# Altium PCB STM32F103ZET6.PCBDOC (part 2 of 5)
Units mil, origin at the board's own origin, x right, y up, seen from the top; angles counter-clockwise.
Board outline 7118.03 x 3660.03 mil, 2 copper layers (Top Layer, Bottom Layer); 158 components, 198 nets, 727 pads, 128 vias.
Unrouted connection lines stored in the file: 5.
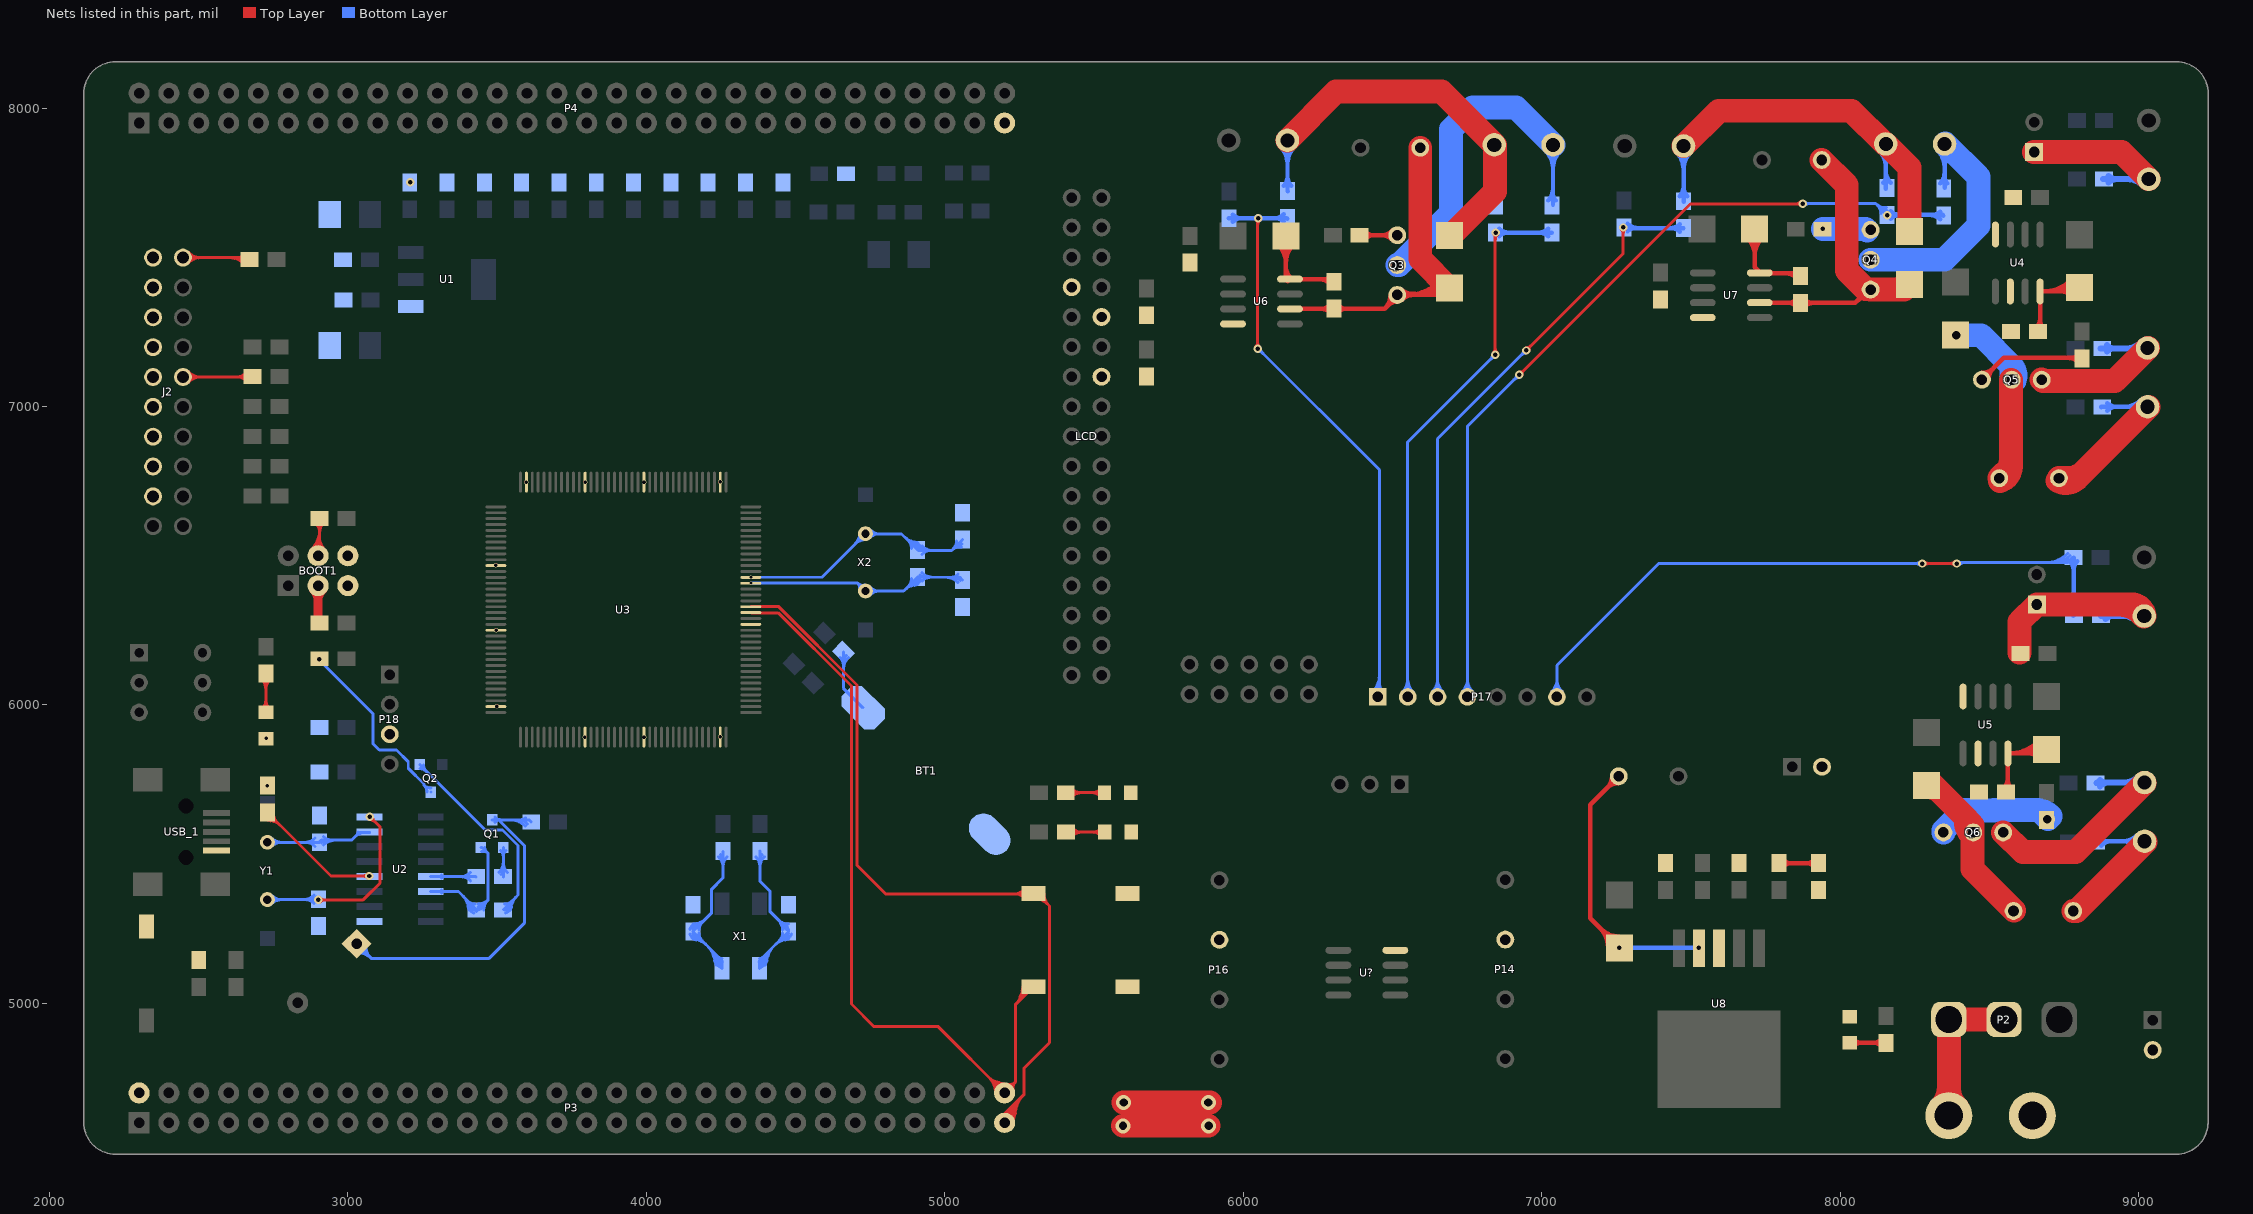
[diagram p2: the nets of this part, all layers, seen from the top]

## Via types
v1: diameter 15, hole 12, Top Layer to Bottom Layer, 57 vias
v2: diameter 28, hole 15, Top Layer to Bottom Layer, 53 vias
v3: diameter 50, hole 28, Top Layer to Bottom Layer, 10 vias
v4: diameter 12, hole 10, Top Layer to Bottom Layer, 4 vias
v5: diameter 20, hole 15, Top Layer to Bottom Layer, 2 vias
v6: diameter 48, hole 28, Top Layer to Bottom Layer, 1 vias
v7: diameter 40, hole 28, Top Layer to Bottom Layer, 1 vias

## Nets (pads, with @x,y where several pads share a name; then routed paths per layer and width w, separated by ;. In a path a pad name is that pad's centre, name@x,y a point inside that pad or via, vN(x,y) a via of type N, cw(c..) or ccw(c..) an arc to the next point about the centre after c; other vN are vias at no path point) (continued)
CY4: P17.7 R35.1 R43.2 | length 2788.9
  Top Layer w10: v2(8275,6474) v2(8390,6474) ; v2@8281.36,6467.64 cw(c8296.73,6452.27) 8296.73,6474 cw(c8296.73,6495.73) v2@8281.36,6480.36 ; v2@8383.64,6467.64 ccw(c8368.27,6452.27) 8368.27,6474 ccw(c8368.27,6495.73) v2@8383.64,6480.36
  Bottom Layer w10: P17.7@7033.66,6044.34 ccw(c6991.79,6086.21) 7051,6086.21 ccw(c7110.21,6086.21) P17.7@7068.34,6044.34 ; P17.7@7040.73,6037.27 ccw(c7015.93,6062.07) 7051,6062.07 ccw(c7086.07,6062.07) P17.7@7061.27,6037.27 ; P17.7@7051,6027 7051,6133 7392,6474 v2@8274,6474 ; v2@8268.64,6467.64 ccw(c8253.27,6452.27) 8253.27,6474 ccw(c8253.27,6495.73) v2@8268.64,6480.36 ; v2(8390,6474) 8393,6477 8762,6477 R35.1@8779,6494 ; v2@8396.36,6467.64 cw(c8418.97,6445.03) 8418.97,6477 ; v2@8396.36,6480.36 ccw(c8404.49,6488.49) 8404.49,6477 ; 8687.67,6477 ccw(c8687.67,6583.33) R35.1@8762.86,6508.14 ; 8711.82,6477 ccw(c8711.82,6559.18) R35.1@8769.93,6501.07 ; 8735.96,6477 ccw(c8735.96,6535.04) R35.1@8777,6494
  Bottom Layer w15: R35.1@8769.63,6481.63 cw(c8739.75,6451.75) 8782,6451.75 cw(c8824.25,6451.75) R35.1@8794.37,6481.63 ; R43.2@8771.63,6311.37 ccw(c8746.58,6336.42) 8782,6336.42 ; R43.2@8781,6299 8782,6300 R35.1@8782,6494 ; 8782,6346.08 ccw(c8831.08,6346.08) R43.2@8796.37,6311.37
CY5: P17.2 R36.1 R44.2 | length 2274.1
  Top Layer w10: v2@6837.64,7180.36 ccw(c6822.27,7195.73) 6844,7195.73 ccw(c6865.73,7195.73) v2@6850.36,7180.36 ; v2@6839.64,7576.64 cw(c6829.1,7566.1) 6844,7566.1 ; v2(6844,7174) 6844,7581 v2(6846,7583) ; 6844,7556.44 cw(c6872.56,7556.44) v2@6852.36,7576.64
  Bottom Layer w10: P17.2@6533.66,6044.34 ccw(c6491.79,6086.21) 6551,6086.21 ccw(c6610.21,6086.21) P17.2@6568.34,6044.34 ; P17.2@6540.73,6037.27 ccw(c6515.93,6062.07) 6551,6062.07 ccw(c6586.07,6062.07) P17.2@6561.27,6037.27 ; P17.2@6551,6027 6551,6881 v2(6844,7174) ; v2@6835,7174 cw(c6813.27,7174) 6828.64,7158.64 cw(c6844,7143.27) v2@6844,7165
  Bottom Layer w15: v2(6846,7583) R36.1@7034,7583 ; R44.2@6850.6,7578.4 cw(c6861.69,7567.31) 6861.69,7583 cw(c6861.69,7598.69) R44.2@6850.6,7587.6 ; R44.2@6857.37,7570.63 cw(c6887.25,7540.75) 6887.25,7583 cw(c6887.25,7625.25) R44.2@6857.37,7595.37 ; R36.1@7021.63,7570.63 ccw(c6991.75,7540.75) 6991.75,7583 ccw(c6991.75,7625.25) R36.1@7021.63,7595.37
CY6: P17.1 R37.1 R45.2 | length 2394.5
  Top Layer w10: v2@6041.64,7200.36 ccw(c6026.27,7215.73) 6048,7215.73 ccw(c6069.73,7215.73) v2@6054.36,7200.36 ; v2@6043.64,7624.64 cw(c6033.1,7614.1) 6048,7614.1 ; v2(6048,7194) 6048,7630 v2@6049,7631 ; 6048,7604.44 cw(c6076.56,7604.44) v2@6056.36,7624.64
  Bottom Layer w10: v2@6046,7198 6456,6788 6456,6032 P17.1@6451,6027 ; v2@6048,7185 cw(c6048,7158.44) 6066.78,7177.22 ; v2@6057,7194 ccw(c6073.9,7194) 6061.95,7182.05 ; P17.1@6433.66,6044.34 ccw(c6379.71,6098.29) 6456,6098.29 ; P17.1@6440.73,6037.27 ccw(c6403.86,6074.14) 6456,6074.14 ccw(c6498.14,6074.14) P17.1@6468.34,6044.34
  Bottom Layer w15: R37.1@5952,7631 v2(6050,7631) 6145,7631 R45.2@6147,7629 ; R37.1@5964.37,7618.63 cw(c5994.25,7588.75) 5994.25,7631 cw(c5994.25,7673.25) R37.1@5964.37,7643.37 ; v2@6045.4,7626.4 ccw(c6034.31,7615.31) 6034.31,7631 ccw(c6034.31,7646.69) v2@6045.4,7635.6 ; v2@6054.6,7626.4 cw(c6065.69,7615.31) 6065.69,7631 cw(c6065.69,7646.69) v2@6054.6,7635.6 ; 6103.34,7631 ccw(c6103.34,7676.66) R45.2@6135.63,7644.37 ; 6108.17,7631 cw(c6108.17,7592.17) R45.2@6135.63,7619.63
CY7: P17.4 R38.1 R46.2 | length 3390.6
  Top Layer w10: v2(6925,7106) 7498,7679 7875,7679 v2@7877,7681 ; v2@6925,7115 ccw(c6925,7136.73) 6940.36,7121.36 ccw(c6955.73,7106) v2@6934,7106 ; 7849.86,7679 ccw(c7849.86,7704.14) v2@7867.64,7686.36 ; 7854.69,7679 cw(c7854.69,7660.69) v2@7867.64,7673.64
  Bottom Layer w10: P17.4@6733.66,6044.34 ccw(c6691.79,6086.21) 6751,6086.21 ccw(c6810.21,6086.21) P17.4@6768.34,6044.34 ; P17.4@6740.73,6037.27 ccw(c6715.93,6062.07) 6751,6062.07 ccw(c6786.07,6062.07) P17.4@6761.27,6037.27 ; P17.4@6751,6027 6751,6934 v2@6923,7106 ; 6906.22,7089.22 cw(c6925,7070.44) v2@6925,7097 ; 6911.05,7094.05 ccw(c6899.1,7106) v2@6916,7106 ; v2(7874,7680) 8119,7680 ; v2@7880.36,7673.64 cw(c7895.73,7658.27) 7895.73,7680 cw(c7895.73,7701.73) v2@7880.36,7686.36 ; 8126.39,7672.61 cw(c8100.79,7647) R46.2@8137,7647 ; R46.2@8134.08,7664.92 ccw(c8153.57,7684.4) R46.2@8156.09,7656.96 ; R46.2@8149,7641 ccw(c8127.27,7641) 8142.64,7656.36 ccw(c8158,7671.73) R46.2@8158,7650 ; R46.2@8155.17,7666.92 cw(c8151.04,7712.04) 8119,7680 ; R46.2@8159,7640 v2(8158,7641) R46.2@8157,7642 8119,7680
  Bottom Layer w15: R46.2@8157,7642 8344,7642 R38.1@8346,7640 ; R46.2@8162.6,7636.4 cw(c8176.11,7622.89) R46.2@8176.11,7642 ; R46.2@8169.37,7629.63 cw(c8199.25,7599.75) 8199.25,7642 cw(c8199.25,7684.25) R46.2@8169.37,7654.37 ; 8299.92,7642 cw(c8299.92,7592.92) R38.1@8334.63,7627.63 ; 8309.58,7642 ccw(c8309.58,7677.42) R38.1@8334.63,7652.37
CY8: P17.3 R39.1 R47.2 | length 2429.1
  Top Layer w10: v2(6948,7188) 7273,7513 v2(7273,7600) ; v2@6948,7197 ccw(c6948,7218.73) 6963.36,7203.36 ccw(c6978.73,7188) v2@6957,7188 ; v2@7266.64,7593.64 cw(c7251.27,7578.27) 7273,7578.27 cw(c7294.73,7578.27) v2@7279.36,7593.64
  Bottom Layer w10: P17.3@6633.66,6044.34 ccw(c6591.79,6086.21) 6651,6086.21 ccw(c6710.21,6086.21) P17.3@6668.34,6044.34 ; P17.3@6640.73,6037.27 ccw(c6615.93,6062.07) 6651,6062.07 ccw(c6686.07,6062.07) P17.3@6661.27,6037.27 ; P17.3@6651,6027 6651,6892 6945,7186 v2@6947,7186 ; 6930.93,7171.93 cw(c6948,7154.86) v2@6948,7179 ; 6933.34,7174.34 ccw(c6919.69,7188) v2@6939,7188
  Bottom Layer w15: R39.1@7277,7600 7279,7598 R47.2@7475,7598 ; R39.1@7277.6,7604.6 ccw(c7293.52,7620.52) R39.1@7293.52,7598 ; R39.1@7287.37,7587.63 cw(c7312.42,7562.58) 7312.42,7598 ; R39.1@7287.37,7612.37 ccw(c7322.08,7647.08) 7322.08,7598 ; R47.2@7462.63,7585.63 ccw(c7432.75,7555.75) 7432.75,7598 ccw(c7432.75,7640.25) R47.2@7462.63,7610.37
GND: BOOT1.5 BOOT1.6 BT1.2 C1.2 C2.2 C3.2 C4.2 C8.2 C9.2 C10.2 C11.2 C12.2 C13.2 C14.2 C15.2 C16.2 C17.2 C18.2 C19.1 C20.1 C21.1 C22.1 C23.1 C24.2 C25.1 C26.2 C27.2 C28.1 C29.2 C30.2 C31.2 C32.1 C33.1 C34.2 C35.2 C36.2 C37.1 C38.2 C39.2 C40.1 C42.2 C44.2 D15.2 J2.4 J2.6 J2.8 J2.10 J2.12 J2.14 J2.16 J2.18 J2.20 key1.1 key2.1 L3.2 LCD.22 LCD.26 LCD.27 LD1.2 LD2.2 LD3.2 P1.1 P3.2 P4.59 P5.2 P6.2 P11.2 P12.2 P14.3 P16.3 P18.3 Q5.3 Q6.3 R28.2 R40.1 R41.1 R42.1 R43.1 RESET.2 U1.1 U2.1 U3.16 U3.38 U3.51 U3.61 U3.71 U3.83 U3.94 U3.107 U3.120 U3.130 U3.143 U4.4 U4.6 U5.4 U5.6 U6.4 U7.4 U8.3 U?.4 USB_1.5 | length 4030.9
  Top Layer w15: C36.2@8570,7255 C36.2@8578,7247
  Top Layer w80: v3(5597,4590) v3@5883,4590 ; v3(5599,4668) v3(5883,4668) 5888,4668 v3@5889,4667 ; Q6.3@8546,5573 8612,5507 8789,5507 P6.2@9020,5738 ; C38.2@8601,6175 8601,6279 C40.1@8659,6337 8976,6337 ; C37.1@8650,7853 8942,7853 P12.2@9033,7762 ; Q5.3@8675,7090 8679,7086 8920,7086 P11.2@9031,7197 ; 8926.1,6337 cw(c8926.1,6204.99) P5.2@9019.45,6298.34 ; P5.2@9017,6296 8976,6337 ; P5.2@9019.63,6297.96 ccw(c8976,6293.11) 8976,6337
  Bottom Layer w20: R42.1@8858,5738 8860.11,5740.11 P6.2@9020,5740.11 ; R42.1@8870.61,5727.39 cw(c8901.31,5696.69) 8901.31,5740.11 ; R42.1@8870.61,5748.61 ccw(c8891.12,5769.12) 8891.12,5740.11 ; R40.1@8873,7194 9027.89,7194 P11.2@9030,7196.11 ; R43.1@8873.5,6298.5 8874.11,6297.89 P5.2@9019,6297.89 ; R41.1@8881,7763 8882.11,7761.89 P12.2@9034,7761.89 ; R43.1@8889.61,6288.39 cw(c8912.53,6265.47) 8912.53,6297.89 ; R43.1@8889.61,6309.61 ccw(c8917.89,6337.89) 8917.89,6297.89 ; R40.1@8893.61,7184.39 cw(c8916.8,7161.2) 8916.8,7194 ; R40.1@8893.61,7205.61 ccw(c8921.63,7233.63) 8921.63,7194 ; R41.1@8899.61,7751.39 cw(c8924.95,7726.05) 8924.95,7761.89 ; R41.1@8899.61,7772.61 ccw(c8925.48,7798.48) 8925.48,7761.89 ; 8954,7194 ccw(c8954,7272.11) P11.2@9009.23,7216.88 ; 8964.19,7194 cw(c8964.19,7130.3) P11.2@9009.23,7175.34 ; P5.2@8998.23,6277.12 ccw(c8948.09,6226.98) 8948.09,6297.89 ccw(c8948.09,6368.8) P5.2@8998.23,6318.66 ; P6.2@8999.23,5719.34 ccw(c8949.09,5669.2) 8949.09,5740.11 ccw(c8949.09,5811.02) P6.2@8999.23,5760.88 ; P12.2@9013.23,7741.12 ccw(c8963.09,7690.98) 8963.09,7761.89 ccw(c8963.09,7832.8) P12.2@9013.23,7782.66
  other v1: 2730,5730 2726,5888 3794,5892 3992,5892 4248,5893 3498,5995 3497,6251 3495,6468 3598,6746 3795,6747 3992,6747 4248,6748
  other v2: 3209,7751
  other v3: 5884,4590
INPUT1+: L11.2 P11.1 R10.2 | length 977.6
  Top Layer w80: L11.2@8727.95,6751.37 ccw(c8755.88,6799.11) 8795,6760 ; L11.2@8733,6750 ccw(c8733,6875.54) 8821.77,6786.77 ; L11.2@8733,6760 8795,6760 ; P11.1@9033,6998 8795,6760
  Bottom Layer w15: R10.2@8874,6998 8875.26,6999.26 P11.1@9030,6999.26 ; R10.2@8895.37,6986.63 cw(c8925.88,6956.12) 8925.88,6999.26 ; R10.2@8895.37,7011.37 ccw(c8924.62,7040.62) 8924.62,6999.26 ; P11.1@9007.46,6976.72 ccw(c8953.06,6922.32) 8953.06,6999.26 ccw(c8953.06,7076.2) P11.1@9007.46,7021.8 ; P11.1@9018.07,6987.33 ccw(c8989.27,6958.53) 8989.27,6999.26 ccw(c8989.27,7039.99) P11.1@9018.07,7011.19
INPUT2+: L12.2 P6.1 R34.2 | length 751
  Top Layer w80: L12.2@8781,5310 8792,5310 P6.1@9023,5541
  Bottom Layer w15: R34.2@8858,5543 8858.26,5543.26 P6.1@9020,5543.26 ; R34.2@8874.37,5528.63 cw(c8909.7,5493.3) 8909.7,5543.26 ; R34.2@8874.37,5553.37 ccw(c8898.79,5577.79) 8898.79,5543.26 ; P6.1@8997.46,5520.72 ccw(c8943.06,5466.32) 8943.06,5543.26 ccw(c8943.06,5620.2) P6.1@8997.46,5565.8 ; P6.1@9008.07,5531.33 ccw(c8979.27,5502.53) 8979.27,5543.26 ccw(c8979.27,5583.99) P6.1@9008.07,5555.19
INPUT3+: P8.1 Q3.2 R36.2 | length 1411
  Bottom Layer w15: P8.1@7015.2,7854.46 cw(c6960.8,7800.06) 7037.74,7800.06 cw(c7114.68,7800.06) P8.1@7060.28,7854.46 ; R36.2@7021.63,7690.37 ccw(c6982.72,7729.28) 7037.74,7729.28 ; P8.1@7025.81,7865.07 cw(c6997.01,7836.27) 7037.74,7836.27 cw(c7078.47,7836.27) P8.1@7049.67,7865.07 ; R36.2@7037.74,7676.74 P8.1@7037.74,7877 ; 7037.74,7711.22 ccw(c7067.22,7711.22) R36.2@7046.37,7690.37
  Bottom Layer w80: Q3.2@6516,7474 6522.07,7474 6696,7647.93 6696,7929 6769,8002 6914,8002 P8.1@7040,7876
INPUT3-: D13.1 P7.2 P8.2 R44.1 R45.1 | length 2074.1
  Top Layer w80: P7.2@6148.11,7892 6311.11,8055 6664,8055 6843.5,7875.5 6843,7875 6843,7720 D13.1@6697,7574
  Bottom Layer w15: P7.2@6125.57,7869.46 cw(c6071.17,7815.06) 6148.11,7815.06 cw(c6225.05,7815.06) P7.2@6170.65,7869.46 ; R45.1@6135.63,7739.37 ccw(c6105.49,7769.51) 6148.11,7769.51 ; P7.2@6136.18,7880.07 cw(c6107.38,7851.27) 6148.11,7851.27 cw(c6188.84,7851.27) P7.2@6160.04,7880.07 ; 6148.11,7768.98 ccw(c6189.98,7768.98) R45.1@6160.37,7739.37 ; P7.2@6148.11,7892 6148.11,7722.89 R45.1@6149,7722 ; P8.2@6818.35,7854.46 cw(c6763.95,7800.06) 6840.89,7800.06 cw(c6917.83,7800.06) P8.2@6863.43,7854.46 ; P8.2@6828.96,7865.07 cw(c6800.16,7836.27) 6840.89,7836.27 cw(c6881.62,7836.27) P8.2@6852.82,7865.07 ; R44.1@6832.63,7690.37 ccw(c6812.67,7710.33) 6840.89,7710.33 ; R44.1@6840.89,7675.11 P8.2@6840.89,7877 ; 6840.89,7730.17 ccw(c6897.17,7730.17) R44.1@6857.37,7690.37
INPUT4+: P10.1 Q4.2 R38.2 | length 1126.7
  Bottom Layer w15: P10.1@8327.2,7857.46 cw(c8272.8,7803.06) 8349.74,7803.06 cw(c8426.68,7803.06) P10.1@8372.28,7857.46 ; R38.2@8334.63,7747.37 ccw(c8298.14,7783.86) 8349.74,7783.86 ; P10.1@8337.81,7868.07 cw(c8309.01,7839.27) 8349.74,7839.27 cw(c8390.47,7839.27) P10.1@8361.67,7868.07 ; R38.2@8349.74,7733.74 P10.1@8349.74,7880 ; 8349.74,7770.63 ccw(c8382.63,7770.63) R38.2@8359.37,7747.37
  Bottom Layer w80: Q4.2@8102,7492 8349,7492 8463,7606 8463,7770 P10.1@8352,7881
INPUT4-: D11.1 P9.2 P10.2 R46.1 R47.1 | length 1938.1
  Top Layer w80: P9.2@7475.11,7873 7593.11,7991 8038,7991 P10.2@8150,7879 ; P10.2@8152.89,7880 8232,7800.89 D11.1@8232,7585
  Bottom Layer w15: P9.2@7452.57,7850.46 cw(c7398.17,7796.06) 7475.11,7796.06 cw(c7552.05,7796.06) P9.2@7497.65,7850.46 ; R47.1@7462.63,7705.37 ccw(c7432.49,7735.51) 7475.11,7735.51 ; P9.2@7463.18,7861.07 cw(c7434.38,7832.27) 7475.11,7832.27 cw(c7515.84,7832.27) P9.2@7487.04,7861.07 ; R47.1@7475.11,7686.11 P9.2@7475.11,7873 ; 7475.11,7734.98 ccw(c7516.98,7734.98) R47.1@7487.37,7705.37 ; P10.2@8130.35,7857.46 cw(c8075.95,7803.06) 8152.89,7803.06 cw(c8229.83,7803.06) P10.2@8175.43,7857.46 ; P10.2@8140.96,7868.07 cw(c8112.16,7839.27) 8152.89,7839.27 cw(c8193.62,7839.27) P10.2@8164.82,7868.07 ; R46.1@8144.63,7749.37 ccw(c8124.67,7769.33) 8152.89,7769.33 ; R46.1@8152.89,7729.11 P10.2@8152.89,7880 ; 8152.89,7789.17 ccw(c8209.17,7789.17) R46.1@8169.37,7749.37
KEY0: key1.2 P3.59 U3.19 | length 4034.2
  Top Layer w10: U3.19@4349.89,6329.27 4443.51,6329.27 4706,6066.79 4706,5463 4802,5367 key1.2@5298,5367 ; P3.59@5195.75,4617.39 ccw(c5183.44,4651.82) 5219.29,4644.6 ; P3.59@5197.84,4607.39 ccw(c5165.36,4665.63) 5230.73,4652.46 ; P3.59@5200,4600 5200,4630.09 5266,4696.09 ; P3.59@5202.72,4598.66 ccw(c5179.28,4640.67) 5226.44,4631.17 ; P3.59@5202.83,4598.73 ccw(c5152.3,4673.61) 5240.98,4656.39 ; P3.59@5208.42,4590.44 ccw(c5171.4,4645.31) 5236.38,4632.69 ; 5219.65,4646.4 ccw(c5259.66,4638.34) P3.59@5225.67,4615.76 ; key1.2@5295,5371 5306,5371 5350.52,5326.48 5350.52,4868.52 5266,4784 5266,4696.09 ; 5335.22,5341.65 cw(c5343.64,5373.05) 5311.52,5368 cw(c5302.43,5331.6) 5338.67,5341.31 ; 5266,4696.09 ccw(c5352.58,4609.51) 5230.38,4601.79 cw(c5352.58,4609.51) 5266,4696.09 ; P3.59@5190.46,4599.27 cw(c5234.76,4602.07) 5203.37,4633.46 ccw(c5234.76,4602.07) P3.59@5190.46,4599.27 ; P3.59@5200.44,4599.9 cw(c5264.22,4603.93) 5219.03,4649.12 ccw(c5264.22,4603.93) P3.59@5200.44,4599.9 ; P3.59@5210.42,4600.53 cw(c5293.67,4605.79) 5234.68,4664.77 ccw(c5293.67,4605.79) P3.59@5210.42,4600.53 ; P3.59@5220.4,4601.16 cw(c5323.12,4607.65) 5250.34,4680.43 ccw(c5323.12,4607.65) P3.59@5220.4,4601.16 ; 5230.82,5367 ccw(c5230.82,5418.7) 5267.38,5382.14 cw(c5230.82,5418.7) 5230.82,5367 ; 5235.65,5367 cw(c5235.65,5322.13) 5267.38,5353.86 ccw(c5235.65,5322.13) 5235.65,5367 ; 5254.96,5367 ccw(c5254.96,5394.56) 5274.45,5375.07 cw(c5254.96,5394.56) 5254.96,5367 ; key1.2@5311.52,5348 cw(c5311.52,5305.8) 5341.36,5335.64 ccw(c5311.52,5305.8) key1.2@5311.52,5348 ; key1.2@5321.52,5368 ccw(c5351.74,5368) 5330.37,5346.63 cw(c5351.74,5368) key1.2@5321.52,5368 ; key1.2@5331.52,5368 ccw(c5385.89,5368) 5347.44,5329.56 cw(c5385.89,5368) key1.2@5331.52,5368
KEY1: key2.2 P3.60 U3.18 | length 3641.2
  Top Layer w10: U3.18@4351.52,6309 4441.44,6309 4687,6063.44 4687,4997.7 4762.7,4922 4978,4922 P3.60@5200,4700 5236,4736 ; 5160.98,4740.89 cw(c5147.12,4689.17) P3.60@5199.58,4699.91 ; 5176.61,4736.7 cw(c5164.85,4692.8) P3.60@5209.37,4701.92 ; P3.60@5186.59,4714.25 cw(c5223,4675.56) 5224.61,4728.66 ; P3.60@5214.25,4686.59 ccw(c5175.56,4723) 5228.66,4724.61 ; 5252.31,5021.62 cw(c5303.19,5007.99) key2.2@5281.52,5056 ; key2.2@5257.77,5042.01 cw(c5291.97,5032.84) key2.2@5277.41,5065.11 ; 5263.41,5025.75 cw(c5291.5,5018.22) key2.2@5284.07,5046.33 ; key2.2@5264.2,5046 cw(c5250.94,5038.35) key2.2@5265.73,5034.39 ; key2.2@5296,5055 5236,4995 5236,4736 ; 5148.05,4751.95 cw(c5096.1,4700) 5169.57,4700 ccw(c5096.1,4700) 5148.05,4751.95 ; 5148.05,4751.95 ccw(c5200,4803.9) 5200,4730.43 cw(c5200,4803.9) 5148.05,4751.95 ; 5165.12,4734.88 cw(c5130.24,4700) 5179.57,4700 ccw(c5130.24,4700) 5165.12,4734.88 ; 5165.12,4734.88 ccw(c5200,4769.76) 5200,4720.43 cw(c5200,4769.76) 5165.12,4734.88 ; 5236,4736 cw(c5216.65,4755.35) 5208.77,4729.14 ccw(c5216.65,4755.35) 5236,4736 ; 5236,4736 ccw(c5255.35,4716.65) 5229.14,4708.77 cw(c5255.35,4716.65) 5236,4736 ; key2.2@5281.52,5056 cw(c5244.15,5056) 5270.57,5029.57 ccw(c5244.15,5056) key2.2@5281.52,5056 ; 5236.43,4995.43 ccw(c5175.86,5056) 5261.52,5056 cw(c5175.86,5056) 5236.43,4995.43 ; 5253.5,5012.5 ccw(c5210,5056) 5271.52,5056 cw(c5210,5056) 5253.5,5012.5
NetBOOT1_3: BOOT1.3 R8.2 | length 281.6
  Top Layer w30: BOOT1.3@2900,6400 2900,6279 R8.2@2904,6275 ; 2900,6350.67 cw(c2949.33,6350.67) 2914.45,6385.55 ccw(c2949.33,6350.67) 2900,6350.67 ; 2900,6350.67 ccw(c2850.67,6350.67) 2885.55,6385.55 cw(c2850.67,6350.67) 2900,6350.67
NetBOOT1_4: BOOT1.4 R9.1 | length 730.5
  Top Layer w10: BOOT1.4@2901,6500 2905,6504 R9.1@2905,6625 ; 2905,6537.26 cw(c2862.74,6537.26) 2892.62,6507.38 ccw(c2862.74,6537.26) 2905,6537.26 ; 2905,6537.26 ccw(c2937.26,6537.26) 2914.45,6514.45 cw(c2937.26,6537.26) 2905,6537.26 ; 2905,6561.4 cw(c2838.6,6561.4) 2885.55,6514.45 ccw(c2838.6,6561.4) 2905,6561.4 ; 2905,6561.4 ccw(c2961.4,6561.4) 2921.52,6521.52 cw(c2961.4,6561.4) 2905,6561.4 ; 2905,6576.72 cw(c2953.28,6576.72) 2919.14,6610.86 ccw(c2953.28,6576.72) 2905,6576.72 ; 2905,6576.72 ccw(c2856.72,6576.72) 2890.86,6610.86 cw(c2856.72,6576.72) 2905,6576.72 ; BOOT1.4@2878.48,6521.52 ccw(c2814.46,6585.54) 2905,6585.54 cw(c2814.46,6585.54) BOOT1.4@2878.48,6521.52
NetBT1_1: BT1.1 R22.1 | length 421.8
  Bottom Layer w10: R22.1@4659.82,6177.18 4659.82,6056.18 BT1.1@4725,5991 ; R22.1@4649.21,6159.5 cw(c4623.61,6133.9) 4659.82,6133.9 ccw(c4623.61,6133.9) R22.1@4649.21,6159.5 ; 4659.82,6116.82 cw(c4720.18,6116.82) 4677.5,6159.5 ccw(c4720.18,6116.82) 4659.82,6116.82 ; 4659.82,6140.97 cw(c4696.03,6140.97) 4670.43,6166.57 ccw(c4696.03,6140.97) 4659.82,6140.97
NetC21_2: C21.2 U2.4 | length 777.3
  Top Layer w10: C21.2@2720.4,5632.2 ccw(c2748.6,5640.43) C21.2@2741,5612.05 ; C21.2@2730,5635 ccw(c2768.56,5646.25) 2758.16,5607.45 ; C21.2@2730,5640 2943,5427 v2(3071,5427) ; 3049.27,5427 cw(c3049.27,5405.27) 3064.64,5420.64 ccw(c3049.27,5405.27) 3049.27,5427 ; 3049.27,5427 ccw(c3049.27,5448.73) 3064.64,5433.36 cw(c3049.27,5448.73) 3049.27,5427 ; C21.2@2730,5615 cw(c2730,5554.64) 2772.68,5597.32 ccw(c2730,5554.64) C21.2@2730,5615 ; C21.2@2730,5625 cw(c2730,5588.79) 2755.61,5614.39 ccw(c2730,5588.79) C21.2@2730,5625 ; C21.2@2750,5635 ccw(c2786.21,5635) 2760.61,5609.39 cw(c2786.21,5635) C21.2@2750,5635
NetC22_2: C22.2 U2.8 Y1.1 | length 1222.5
  Top Layer w10: v2(2901,5347) 3051,5347 3107,5403 3107,5592 v2@3073,5626 ; v2@3072.03,5624.76 ccw(c3087.39,5628.52) 3083.3,5613.24 ; v2@3073.16,5625.99 cw(c3070.9,5612.11) 3084.48,5615.75 ; 2922.73,5347 cw(c2922.73,5368.73) 2907.36,5353.36 ccw(c2922.73,5368.73) 2922.73,5347 ; 2922.73,5347 ccw(c2922.73,5325.27) 2907.36,5340.64 cw(c2922.73,5325.27) 2922.73,5347 ; v2@3073,5616 cw(c3073,5591.86) 3090.07,5608.93 ccw(c3073,5591.86) v2@3073,5616 ; v2@3082,5625 ccw(c3101.31,5625) 3087.66,5611.34 cw(c3101.31,5625) v2@3082,5625
  Bottom Layer w10: Y1.1@2730,5347.88 2900.88,5347.88 C22.2@2901,5348 ; 2778.28,5347.88 cw(c2778.28,5396.16) 2744.14,5362.02 ccw(c2778.28,5396.16) 2778.28,5347.88 ; 2778.28,5347.88 ccw(c2778.28,5299.59) 2744.14,5333.73 cw(c2778.28,5299.59) 2778.28,5347.88 ; 2850,5347.88 ccw(c2850,5400) 2886.86,5363.14 cw(c2850,5400) 2850,5347.88 ; 2855.43,5347.88 cw(c2855.43,5303.43) 2886.86,5334.86 ccw(c2855.43,5303.43) 2855.43,5347.88 ; 2874.14,5347.88 ccw(c2874.14,5375.86) 2893.93,5356.07 cw(c2874.14,5375.86) 2874.14,5347.88 ; C22.2@2877.16,5347.88 cw(c2877.16,5323.16) 2894.64,5340.64 ccw(c2877.16,5323.16) C22.2@2877.16,5347.88 ; C22.2@2881.39,5347.88 ccw(c2881.39,5366.61) 2894.64,5353.36 cw(c2881.39,5366.61) C22.2@2881.39,5347.88
  other v2: 3073,5625
NetC23_2: C23.2 U2.7 Y1.2 | length 910.4
  Bottom Layer w10: Y1.2@2730,5540 2902,5540 C23.2@2903,5541 ; C23.2@2904,5540 2910.81,5546.81 3011.81,5546.81 3038,5573 U2.7@3073,5573 ; 2778.28,5540 cw(c2778.28,5588.29) 2744.14,5554.14 ccw(c2778.28,5588.29) 2778.28,5540 ; 2778.28,5540 ccw(c2778.28,5491.72) 2744.14,5525.86 cw(c2778.28,5491.72) 2778.28,5540 ; 2855.71,5540 cw(c2855.71,5491.71) 2889.86,5525.86 ccw(c2855.71,5491.71) 2855.71,5540 ; 2855.72,5540 ccw(c2855.72,5588.28) 2889.86,5554.14 cw(c2855.72,5588.28) 2855.72,5540 ; C23.2@2911.07,5537.93 cw(c2932.51,5516.49) 2932.51,5546.81 ccw(c2932.51,5516.49) C23.2@2911.07,5537.93 ; C23.2@2918.14,5530.86 cw(c2956.66,5492.34) 2956.66,5546.81 ccw(c2956.66,5492.34) C23.2@2918.14,5530.86 ; C23.2@2918.14,5559.14 ccw(c2947.91,5588.91) 2947.91,5546.81 cw(c2947.91,5588.91) C23.2@2918.14,5559.14 ; 3027.57,5562.57 cw(c3041.14,5548.99) 3041.14,5568.19 ccw(c3041.14,5548.99) 3027.57,5562.57 ; U2.7@3030.32,5565.32 ccw(c3020.64,5575) 3034.33,5575 cw(c3020.64,5575) U2.7@3030.32,5565.32
NetC24_1: C24.1 R23.2 U3.23 X2.2 | length 1673.1
  Bottom Layer w10: v4(4350,6408) 4708,6408 ; 4880.84,6396.45 ccw(c4870.44,6435.25) R23.2@4909,6424 ; R23.2@4898,6401.05 ccw(c4890.4,6429.43) R23.2@4918.6,6421.2 ; R23.2@4909,6429 4862,6382 4734,6382 4708,6408 ; R23.2@4913,6431 4916,6428 5050,6428 C24.1@5059,6419 ; 4708,6408 cw(c4691.13,6391.13) 4714.45,6386.1 ccw(c4691.13,6391.13) 4708,6408 ; 4708,6408 ccw(c4725.02,6425.02) 4729.92,6401.45 cw(c4725.02,6425.02) 4708,6408 ; X2.2@4748.14,6367.73 cw(c4782.59,6333.29) 4782.59,6382 ccw(c4782.59,6333.29) X2.2@4748.14,6367.73 ; X2.2@4748.14,6396.02 ccw(c4781.98,6429.85) 4781.98,6382 cw(c4781.98,6429.85) X2.2@4748.14,6396.02 ; 4866.32,6386.32 cw(c4909,6343.64) 4909,6404 ccw(c4909,6343.64) 4866.32,6386.32 ; 4878.39,6398.39 ccw(c4852.79,6424) 4889,6424 cw(c4852.79,6424) 4878.39,6398.39 ; 4883.39,6403.39 cw(c4909,6377.79) 4909,6414 ccw(c4909,6377.79) 4883.39,6403.39 ; R23.2@4916.07,6436.07 ccw(c4935.56,6455.56) 4935.56,6428 cw(c4935.56,6455.56) R23.2@4916.07,6436.07 ; R23.2@4923.14,6414.86 cw(c4954.87,6383.13) 4954.87,6428 ccw(c4954.87,6383.13) R23.2@4923.14,6414.86 ; R23.2@4923.14,6443.14 ccw(c4959.7,6479.7) 4959.7,6428 cw(c4959.7,6479.7) R23.2@4923.14,6443.14 ; 5001.06,6428 cw(c5001.06,6366.06) 5044.86,6409.86 ccw(c5001.06,6366.06) 5001.06,6428 ; 5020.37,6428 ccw(c5020.37,6462.63) 5044.86,6438.14 cw(c5020.37,6462.63) 5020.37,6428 ; 5025.2,6428 cw(c5025.2,6390.2) 5051.93,6416.93 ccw(c5025.2,6390.2) 5025.2,6428
NetC25_2: C25.2 R20.1 X1.1 | length 1661.5
  Bottom Layer w10: C25.2@4146.4,5232.8 ccw(c4174.6,5241.03) C25.2@4167,5212.66 ; C25.2@4146.4,5248.41 cw(c4174.6,5240.18) C25.2@4167,5268.55 ; C25.2@4156,5235.61 ccw(c4194.56,5246.86) 4184.16,5208.06 ; C25.2@4156,5245.61 cw(c4194.56,5234.35) 4184.16,5273.15 ; 4222.85,5164.84 ccw(c4274.32,5178.63) X1.1@4253.24,5129.69 ; X1.1@4228.2,5144.9 ccw(c4263.92,5154.47) X1.1@4249.28,5120.51 ; 4234.08,5160.27 ccw(c4262.25,5167.82) X1.1@4255.47,5139.45 ; X1.1@4235.18,5139.44 ccw(c4222.37,5146.84) X1.1@4236.65,5150.66 ; X1.1@4253.01,5117.34 4253.01,5143.6 C25.2@4156,5240.61 4217.42,5302.02 4217.42,5381.28 4257,5420.86 R20.1@4257,5509.61 ; C25.2@4156,5215.61 cw(c4156,5155.25) 4198.68,5197.93 ccw(c4156,5155.25) C25.2@4156,5215.61 ; C25.2@4156,5225.61 cw(c4156,5189.39) 4181.61,5215 ccw(c4156,5189.39) C25.2@4156,5225.61 ; C25.2@4156,5255.61 ccw(c4156,5291.82) 4181.61,5266.21 cw(c4156,5291.82) C25.2@4156,5255.61 ; C25.2@4156,5265.61 ccw(c4156,5325.96) 4198.68,5283.28 cw(c4156,5325.96) C25.2@4156,5265.61 ; C25.2@4176,5235.61 ccw(c4212.21,5235.61) 4186.61,5210 cw(c4212.21,5235.61) C25.2@4176,5235.61 ; C25.2@4176,5245.61 cw(c4212.21,5245.61) 4186.61,5271.21 ccw(c4212.21,5245.61) C25.2@4176,5245.61 ; 4207.64,5188.97 cw(c4147.83,5129.15) 4232.42,5129.15 ccw(c4147.83,5129.15) 4207.64,5188.97 ; 4224.71,5171.89 cw(c4181.97,5129.15) 4242.42,5129.15 ccw(c4181.97,5129.15) 4224.71,5171.89 ; 4241.78,5154.82 cw(c4216.11,5129.15) 4252.42,5129.15 ccw(c4216.11,5129.15) 4241.78,5154.82 ; R20.1@4241.86,5491.46 cw(c4205.3,5454.91) 4257,5454.91 ccw(c4205.3,5454.91) R20.1@4241.86,5491.46 ; X1.1@4242.52,5154.08 ccw(c4253.01,5164.57) 4253.01,5149.74 cw(c4253.01,5164.57) X1.1@4242.52,5154.08 ; R20.1@4248.93,5498.53 cw(c4229.44,5479.05) 4257,5479.05 ccw(c4229.44,5479.05) R20.1@4248.93,5498.53 ; 4257,5459.74 cw(c4301.87,5459.74) 4270.14,5491.46 ccw(c4301.87,5459.74) 4257,5459.74
NetC26_1: C26.1 R21.1 X1.4 | length 1610.1
  Bottom Layer w10: X1.4@4376.53,5139.45 ccw(c4369.75,5167.82) 4397.92,5160.27 ; X1.4@4378.76,5129.69 ccw(c4357.68,5178.63) 4409.15,5164.84 ; X1.4@4378.99,5117.34 4378.99,5143.6 C26.1@4476,5240.61 C26.1@4476,5245.61 ; R21.1@4381,5510.61 4380,5509.61 4380,5410 4414.58,5375.42 4414.58,5307.02 C26.1@4476,5245.61 ; X1.4@4382.72,5120.51 ccw(c4368.08,5154.47) X1.4@4403.8,5144.9 ; X1.4@4395.35,5150.66 ccw(c4409.63,5146.84) X1.4@4396.82,5139.44 ; 4447.84,5208.06 ccw(c4437.44,5246.86) C26.1@4476,5235.61 ; 4449.25,5270.8 ccw(c4483.01,5279.85) C26.1@4476,5245.61 ; 4450.8,5272.36 cw(c4441.76,5238.59) C26.1@4476,5245.61 ; C26.1@4465,5212.66 ccw(c4457.4,5241.03) C26.1@4485.6,5232.8 ; 4441.86,5279.75 cw(c4407.72,5245.61) 4456,5245.61 ccw(c4407.72,5245.61) 4441.86,5279.75 ; 4441.86,5279.75 ccw(c4476,5313.89) 4476,5265.61 cw(c4476,5313.89) 4441.86,5279.75 ; R21.1@4366.86,5491.46 cw(c4335.13,5459.74) 4380,5459.74 ccw(c4335.13,5459.74) R21.1@4366.86,5491.46 ; X1.4@4378.99,5149.74 ccw(c4378.99,5164.57) 4389.48,5154.08 cw(c4378.99,5164.57) X1.4@4378.99,5149.74 ; X1.4@4379.58,5129.15 cw(c4415.89,5129.15) 4390.22,5154.82 ccw(c4415.89,5129.15) X1.4@4379.58,5129.15 ; 4380,5454.91 cw(c4431.7,5454.91) 4395.14,5491.46 ccw(c4431.7,5454.91) 4380,5454.91 ; 4380,5479.05 cw(c4407.56,5479.05) 4388.07,5498.53 ccw(c4407.56,5479.05) 4380,5479.05 ; X1.4@4389.58,5129.15 cw(c4450.03,5129.15) 4407.29,5171.89 ccw(c4450.03,5129.15) X1.4@4389.58,5129.15 ; X1.4@4399.58,5129.15 cw(c4484.18,5129.15) 4424.36,5188.97 ccw(c4484.18,5129.15) X1.4@4399.58,5129.15 ; 4433.32,5197.93 cw(c4476,5155.25) 4476,5215.61 ccw(c4476,5155.25) 4433.32,5197.93 ; 4445.39,5210 ccw(c4419.79,5235.61) 4456,5235.61 cw(c4419.79,5235.61) 4445.39,5210 ; 4450.39,5215 cw(c4476,5189.39) 4476,5225.61 ccw(c4476,5189.39) 4450.39,5215
NetC27_1: C27.1 R23.1 U3.24 X2.1 | length 1881.1
  Bottom Layer w10: v4(4350,6428) 4588,6428 X2.1@4734,6574 ; 4707.25,6548.8 cw(c4741.01,6539.76) X2.1@4734,6574 ; 4708.8,6547.25 ccw(c4699.76,6581.01) X2.1@4734,6574 ; 4880.84,6551.55 cw(c4870.44,6512.75) R23.1@4909,6524 ; R23.1@4898,6546.95 cw(c4890.4,6518.57) R23.1@4918.6,6526.8 ; R23.1@4909,6519 4855,6573 4735,6573 X2.1@4734,6574 ; R23.1@4909,6520 4911,6518 5023,6518 ; C27.1@5059,6554 5023,6518 ; 4699.86,6539.86 cw(c4734,6505.72) 4734,6554 ccw(c4734,6505.72) 4699.86,6539.86 ; 4699.86,6539.86 ccw(c4665.72,6574) 4714,6574 cw(c4665.72,6574) 4699.86,6539.86 ; 5023,6518 cw(c5050.89,6490.11) 5056.27,6529.19 ccw(c5050.89,6490.11) 5023,6518 ; X2.1@4741.07,6581.07 ccw(c4760.56,6600.56) 4760.56,6573 cw(c4760.56,6600.56) X2.1@4741.07,6581.07 ; X2.1@4748.14,6559.86 cw(c4779.87,6528.13) 4779.87,6573 ccw(c4779.87,6528.13) X2.1@4748.14,6559.86 ; X2.1@4748.14,6588.14 ccw(c4784.7,6624.7) 4784.7,6573 cw(c4784.7,6624.7) X2.1@4748.14,6588.14 ; 4866.32,6561.68 ccw(c4909,6604.36) 4909,6544 cw(c4909,6604.36) 4866.32,6561.68 ; 4878.39,6549.61 cw(c4852.79,6524) 4889,6524 ccw(c4852.79,6524) 4878.39,6549.61 ; 4883.39,6544.61 ccw(c4909,6570.21) 4909,6534 cw(c4909,6570.21) 4883.39,6544.61 ; R23.1@4916.07,6526.07 ccw(c4935.56,6545.56) 4935.56,6518 cw(c4935.56,6545.56) R23.1@4916.07,6526.07 ; R23.1@4923.14,6504.86 cw(c4954.87,6473.13) 4954.87,6518 ccw(c4954.87,6473.13) R23.1@4923.14,6504.86 ; R23.1@4923.14,6533.14 ccw(c4959.7,6569.7) 4959.7,6518 cw(c4959.7,6569.7) R23.1@4923.14,6533.14 ; 5028.39,6523.39 ccw(c5002.79,6549) 5039,6549 cw(c5002.79,6549) 5028.39,6523.39 ; C27.1@5037.23,6532.23 cw(c5054.34,6515.13) 5057.64,6539.09 ccw(c5054.34,6515.13) C27.1@5037.23,6532.23
NetC33_2: C33.2 R27.2 | length 264.7
  Top Layer w15: R27.2@7795,5470 C33.2@7927,5470 ; R27.2@7807.37,5457.63 cw(c7837.25,5427.75) 7837.25,5470 cw(c7837.25,5512.25) R27.2@7807.37,5482.37 ; C33.2@7915.63,5457.63 ccw(c7885.75,5427.75) 7885.75,5470 ccw(c7885.75,5512.25) C33.2@7915.63,5482.37
NetC36_1: C36.1 D6.2 U4.8 | length 603.3
  Top Layer w15: C36.1@8655.63,7263.37 ccw(c8620.92,7298.08) 8670,7298.08 ; C36.1@8662,7254 8670,7262 U4.8@8670,7385.53 8785.53,7385.53 D6.2@8797,7397 ; 8670,7288.42 ccw(c8705.42,7288.42) C36.1@8680.37,7263.37 ; U4.8@8679.68,7385.53 ccw(c8679.68,7520.73) D6.2@8775.29,7425.13 ; 8715.9,7385.53 ccw(c8715.9,7484.52) D6.2@8785.9,7414.52 ; 8741.92,7385.53 cw(c8741.92,7338.34) D6.2@8775.29,7371.71 ; 8752.11,7385.53 ccw(c8752.11,7448.31) D6.2@8796.5,7403.92
NetC39_1: C39.1 D8.2 U5.8 | length 611.6
  Top Layer w15: C39.1@8547.63,5721.37 ccw(c8512.92,5756.08) 8562,5756.08 ; C39.1@8556,5707 8562,5713 U5.8@8562,5837.53 8679.53,5837.53 D8.2@8693,5851 ; 8562,5746.42 ccw(c8597.42,5746.42) C39.1@8572.37,5721.37 ; U5.8@8566.27,5837.53 ccw(c8566.27,5976.15) D8.2@8664.29,5878.13 ; 8602.48,5837.53 ccw(c8602.48,5939.94) D8.2@8674.9,5867.52 ; 8633.33,5837.53 cw(c8633.33,5793.75) D8.2@8664.29,5824.71 ; 8638.7,5837.53 ccw(c8638.7,5903.72) D8.2@8685.5,5856.92
NetC41_1: C41.1 D12.2 U6.8 | length 659
  Top Layer w15: D12.2@6115.87,7545.29 cw(c6051.38,7480.8) 6142.58,7480.8 cw(c6233.78,7480.8) D12.2@6169.29,7545.29 ; D12.2@6126.48,7555.9 cw(c6087.6,7517.01) 6142.58,7517.01 cw(c6197.57,7517.01) D12.2@6158.69,7555.9 ; U6.8@6142.58,7434.73 ccw(c6164.2,7434.73) U6.8@6148.91,7419.44 ; 6142.58,7470.94 ccw(c6200.41,7470.94) U6.8@6159.52,7430.05 ; D12.2@6142.58,7572 6142.58,7437.42 6153,7427 6293,7427 C41.1@6301,7419 ; 6252.09,7427 cw(c6252.09,7371.09) C41.1@6291.63,7410.63 ; 6271.41,7427 ccw(c6271.41,7455.59) C41.1@6291.63,7435.37
NetC41_2: C41.2 D13.2 L13.2 Q3.3 U6.6 | length 1772.5
  Top Layer w15: U6.6@6156.47,7327 6302,7327 C41.2@6304,7329 ; 6259.34,7327 ccw(c6259.34,7372.66) C41.2@6291.63,7340.37 ; 6264.17,7327 cw(c6264.17,7288.17) C41.2@6291.63,7315.63 ; C41.2@6304,7328 6474,7328 Q3.3@6518,7372 ; C41.2@6316.37,7315.63 cw(c6346.25,7285.75) 6346.25,7328 cw(c6346.25,7370.25) C41.2@6316.37,7340.37 ; 6474.76,7328.76 ccw(c6429.52,7374) Q3.3@6493.5,7374 ; 6484.42,7338.42 cw(c6516,7306.84) Q3.3@6516,7351.5 ; Q3.3@6516,7374 6678,7374 D13.2@6695,7391 ; Q3.3@6530.37,7391.31 ccw(c6568.27,7436.95) 6576.28,7378.17 ; Q3.3@6531.91,7358.09 cw(c6570.32,7319.68) 6570.32,7374 cw(c6570.32,7428.32) Q3.3@6531.91,7389.91 ; Q3.3@6533.91,7360.39 cw(c6566.26,7335.8) 6560.77,7376.06 ; Q3.3@6545.68,7374 ccw(c6545.68,7541.74) D13.2@6664.29,7423.13 ; 6581.89,7374 ccw(c6581.89,7505.52) D13.2@6674.9,7412.52 ; 6618.11,7374 ccw(c6618.11,7469.31) D13.2@6685.5,7401.92
  Top Layer w80: L13.2@6593,7867 6593,7494 D13.2@6691,7396
NetC43_1: C43.1 D10.2 U7.8 | length 601.4
  Top Layer w15: D10.2@7686.87,7568.29 cw(c7622.38,7503.8) 7713.58,7503.8 cw(c7804.78,7503.8) D10.2@7740.29,7568.29 ; D10.2@7697.48,7578.9 cw(c7658.6,7540.01) 7713.58,7540.01 cw(c7768.57,7540.01) D10.2@7729.69,7578.9 ; D10.2@7713.58,7595 7713.58,7467.42 7734,7447 7857,7447 C43.1@7867,7437 C43.1@7868,7437 ; U7.8@7765.02,7451.05 ccw(c7774.79,7460.82) 7774.79,7447 ; 7812.68,7447 cw(c7812.68,7387.68) C43.1@7854.63,7429.63 ; 7836.82,7447 ccw(c7836.82,7472.18) C43.1@7854.63,7454.37
NetC43_2: C43.2 D11.2 L14.2 Q4.3 U7.6 | length 1321.8
  Top Layer w15: U7.6@7730.47,7348 7863,7348 C43.2@7865,7346 ; 7822.34,7348 cw(c7822.34,7302.34) C43.2@7854.63,7334.63 ; 7827.17,7348 ccw(c7827.17,7386.83) C43.2@7854.63,7359.37 ; C43.2@7867,7347 8049,7347 Q4.3@8088,7386 ; C43.2@7879.37,7334.63 cw(c7909.25,7304.75) 7909.25,7347 cw(c7909.25,7389.25) C43.2@7879.37,7359.37 ; 8049.93,7347.93 cw(c8102,7295.87) Q4.3@8102,7369.5 ; 8069.25,7367.25 ccw(c8044.49,7392) Q4.3@8079.5,7392 ; 8075.54,7373.54 cw(c8102,7347.08) Q4.3@8102,7384.5
  Top Layer w80: L14.2@7938,7826 8022,7742 8022,7456 8085,7393 Q4.3@8096,7393 ; Q4.3@8102,7392 8214,7392 D11.2@8234,7412 ; 8178.21,7392 ccw(c8178.21,7464.2) D11.2@8229.27,7413.15
NetD1_2: D1.2 Q1.3 R15.1 | length 1897.4
  Bottom Layer w10: D1.2@3028.83,5199.83 3077.66,5151 3473,5151 3591,5269 3591,5529 3505,5615 ; Q1.3@3483,5615 3505,5615 ; Q1.3@3483,5615.26 3606.74,5615.26 R15.1@3614,5608 ; 3061.61,5167.05 cw(c3091.58,5197.01) 3049.24,5198.91 ccw(c3091.58,5197.01) 3061.61,5167.05 ; 3061.61,5167.05 ccw(c3031.64,5137.08) 3029.74,5179.42 cw(c3031.64,5137.08) 3061.61,5167.05 ; 3077.65,5151 cw(c3122.28,5195.63) 3059.23,5198.46 ccw(c3122.28,5195.63) 3077.65,5151 ; 3077.65,5151 ccw(c3033.02,5106.37) 3030.19,5169.43 cw(c3033.02,5106.37) 3077.65,5151 ; 3505,5615 cw(c3505,5627.42) 3494.13,5621.41 ccw(c3505,5627.42) 3505,5615 ; 3505,5615 ccw(c3505,5602.06) 3493.9,5608.72 cw(c3505,5602.06) 3505,5615 ; 3513.7,5615.26 cw(c3513.7,5645.96) 3491.99,5624.25 ccw(c3513.7,5645.96) 3513.7,5615.26 ; 3513.7,5615.26 ccw(c3513.7,5584.56) 3491.99,5606.27 cw(c3513.7,5584.56) 3513.7,5615.26 ; 3543.19,5615.26 cw(c3543.19,5542.19) 3594.86,5593.86 ccw(c3543.19,5542.19) 3543.19,5615.26 ; 3567.33,5615.26 cw(c3567.33,5566.33) 3601.93,5600.93 ccw(c3567.33,5566.33) 3567.33,5615.26 ; 3578.24,5615.26 ccw(c3578.24,5638.76) 3594.86,5622.14 cw(c3578.24,5638.76) 3578.24,5615.26
NetD5_1: D5.1 L10.2 U8.4 | length 1300.4
  Top Layer w15: 7194.39,5253.61 cw(c7127.21,5186.42) D5.1@7222.22,5186.42 ; 7198.21,5249.79 ccw(c7260,5311.57) D5.1@7260,5224.19 ; D5.1@7220,5228 cw(c7178.42,5186.42) D5.1@7237.22,5186.42 ; D5.1@7223.82,5224.18 ccw(c7260,5260.36) D5.1@7260,5209.19 ; L10.2@7235.5,5761 cw(c7181.18,5761) 7219.59,5722.59 cw(c7258,5684.18) L10.2@7258,5738.5 ; D5.1@7245.78,5202.22 cw(c7229.57,5186) D5.1@7252.5,5186 ; L10.2@7258,5761 7163,5666 7163,5285 D5.1@7259,5189
  Bottom Layer w15: v2(7259,5186) v2(7526,5186) ; v2@7263.6,5181.4 cw(c7274.69,5170.31) 7274.69,5186 cw(c7274.69,5201.69) v2@7263.6,5190.6 ; v2@7521.4,5181.4 ccw(c7510.31,5170.31) 7510.31,5186 ccw(c7510.31,5201.69) v2@7521.4,5190.6
NetD7_1: D7.1 L11.1 Q5.2 | length 889.3
  Top Layer w80: L11.1@8533,6760 8572,6799 ; L11.1@8535.88,6750.42 ccw(c8521.28,6799) 8572,6799 ; L11.1@8540.07,6752.93 ccw(c8462.99,6830.01) 8572,6830.01 ; Q5.2@8572,7089 8572,6799
  Bottom Layer w80: v3(8389,7239) 8472,7239 8573,7138 ; 8559.54,7151.46 cw(c8498.09,7090) Q5.2@8585,7090 ; Q5.2@8573,7094 8573,7138 ; Q5.2@8584.4,7086.58 ccw(c8538.35,7103.35) 8573,7138
NetD9_1: D9.1 L12.1 Q6.2 | length 702.6
  Top Layer w80: D9.1@8290,5725.14 cw(c8290,5657.89) 8337.56,5705.44 ; D9.1@8290,5730.42 8312.58,5730.42 8421,5622 8421,5619 8443,5597 8443,5450 L12.1@8582,5311 ; 8421,5609.21 ccw(c8482.21,5609.21) 8438.93,5565.93 cw(c8482.21,5609.21) 8421,5609.21
NetD15_1: D15.1 R26.1 | length 246.1
  Top Layer w15: D15.1@8031,4870 8033,4868 R26.1@8153,4868 ; D15.1@8045.11,4857.39 cw(c8070.71,4831.79) 8070.71,4868 cw(c8070.71,4904.21) D15.1@8045.11,4878.61 ; R26.1@8140.63,4855.63 ccw(c8110.75,4825.75) 8110.75,4868 ccw(c8110.75,4910.25) R26.1@8140.63,4880.37
NetJ2_11: J2.11 R12.1 | length 732.8
  Top Layer w10: J2.11@2447,7099 2680,7099 R12.1@2681,7100 ; 2483.21,7099 cw(c2483.21,7135.21) 2457.61,7109.61 ccw(c2483.21,7135.21) 2483.21,7099 ; 2483.21,7099 ccw(c2483.21,7062.79) 2457.61,7088.39 cw(c2483.21,7062.79) 2483.21,7099 ; 2507.36,7099 cw(c2507.36,7159.36) 2464.68,7116.68 ccw(c2507.36,7159.36) 2507.36,7099 ; 2507.36,7099 ccw(c2507.36,7038.64) 2464.68,7081.32 cw(c2507.36,7038.64) 2507.36,7099 ; 2624.3,7099 ccw(c2624.3,7150.7) 2660.86,7114.14 cw(c2624.3,7150.7) 2624.3,7099 ; 2629.13,7099 cw(c2629.13,7054.13) 2660.86,7085.86 ccw(c2629.13,7054.13) 2629.13,7099 ; 2648.44,7099 ccw(c2648.44,7126.56) 2667.93,7107.07 cw(c2648.44,7126.56) 2648.44,7099
NetJ2_19: J2.19 R14.1 | length 752.1
  Top Layer w10: J2.19@2447,7499 2664,7499 R14.1@2670,7493 ; R14.1@2671,7492 R14.1@2672,7493 ; 2483.21,7499 cw(c2483.21,7535.21) 2457.61,7509.61 ccw(c2483.21,7535.21) 2483.21,7499 ; 2483.21,7499 ccw(c2483.21,7462.79) 2457.61,7488.39 cw(c2483.21,7462.79) 2483.21,7499 ; 2507.36,7499 cw(c2507.36,7559.36) 2464.68,7516.68 ccw(c2507.36,7559.36) 2507.36,7499 ; 2507.36,7499 ccw(c2507.36,7438.64) 2464.68,7481.32 cw(c2507.36,7438.64) 2507.36,7499 ; 2602.23,7499 cw(c2602.23,7430.23) 2650.86,7478.86 ccw(c2602.23,7430.23) 2602.23,7499 ; 2626.37,7499 cw(c2626.37,7454.37) 2657.93,7485.93 ccw(c2626.37,7454.37) 2626.37,7499 ; 2631.2,7499 ccw(c2631.2,7526.8) 2650.86,7507.14 cw(c2631.2,7526.8) 2631.2,7499
NetLD1_1: LD1.1 R1.1 | length 413.8
  Top Layer w10: R1.1@5406,5574 5534,5574 LD1.1@5535,5575 ; 5459.28,5574 cw(c5459.28,5622.28) 5425.14,5588.14 ccw(c5459.28,5622.28) 5459.28,5574 ; 5459.28,5574 ccw(c5459.28,5525.72) 5425.14,5559.86 cw(c5459.28,5525.72) 5459.28,5574 ; 5493.75,5574 cw(c5493.75,5531.75) 5523.63,5561.63 ccw(c5493.75,5531.75) 5493.75,5574 ; 5493.75,5574 ccw(c5493.75,5616.25) 5523.63,5586.37 cw(c5493.75,5616.25) 5493.75,5574
NetLD2_1: LD2.1 R2.1 | length 414.4
  Top Layer w10: R2.1@5405,5706 LD2.1@5535,5706 ; 5458.28,5706 cw(c5458.28,5754.28) 5424.14,5720.14 ccw(c5458.28,5754.28) 5458.28,5706 ; 5458.28,5706 ccw(c5458.28,5657.72) 5424.14,5691.86 cw(c5458.28,5657.72) 5458.28,5706 ; 5492.75,5706 cw(c5492.75,5663.75) 5522.63,5693.63 ccw(c5492.75,5663.75) 5492.75,5706 ; 5492.75,5706 ccw(c5492.75,5748.25) 5522.63,5718.37 cw(c5492.75,5748.25) 5492.75,5706
NetLD3_1: LD3.1 R13.1 | length 415.4
  Top Layer w10: LD3.1@2725,5974 LD3.1@2725,5975 R13.1@2725,6105 ; 2725,6017.25 cw(c2682.75,6017.25) 2712.63,5987.37 ccw(c2682.75,6017.25) 2725,6017.25 ; 2725,6017.25 ccw(c2767.25,6017.25) 2737.37,5987.37 cw(c2767.25,6017.25) 2725,6017.25 ; 2725,6051.72 cw(c2773.28,6051.72) 2739.14,6085.86 ccw(c2773.28,6051.72) 2725,6051.72 ; 2725,6051.72 ccw(c2676.72,6051.72) 2710.86,6085.86 cw(c2676.72,6051.72) 2725,6051.72
NetP1_2: P1.2 P2.1 P2.2 | length 653
  Top Layer w80: P1.2@8336.61,4651.39 ccw(c8270.47,4717.53) 8364,4717.53 ccw(c8457.53,4717.53) P1.2@8391.39,4651.39 ; P2.1@8363,4945 8364,4944 P1.2@8364,4624 ; P2.1@8364,4946 8543,4946 P2.2@8547,4942
NetQ1_1: Q1.1 R17.2 U2.14 | length 1107.4
  Bottom Layer w10: U2.14@3277.36,5375 3370,5375 R17.2@3430,5315 ; 3397.14,5342.35 ccw(c3438.08,5353.32) R17.2@3425,5313 ; R17.2@3401.9,5324.57 ccw(c3431.31,5332.45) R17.2@3421.91,5303.49 ; R17.2@3431,5308 3470,5347 ; Q1.1@3445.6,5522.74 3449.26,5522.74 3470,5502 ; 3461.59,5337.6 cw(c3428.78,5346.4) 3435,5313 cw(c3470.88,5303.64) 3461.91,5339.62 ; 3325.3,5375 cw(c3325.3,5391.44) 3313.67,5379.82 ccw(c3325.3,5391.44) 3325.3,5375 ; 3325.3,5375 ccw(c3325.3,5358.56) 3313.67,5370.18 cw(c3325.3,5358.56) 3325.3,5375 ; 3470,5347 cw(c3436.18,5380.82) 3435.35,5333 ccw(c3436.18,5380.82) 3470,5347 ; 3470,5347 3470,5502 ; 3470,5502 ccw(c3451.79,5483.8) 3447.65,5509.21 cw(c3451.79,5483.8) 3470,5502 ; 3385.91,5359.09 cw(c3339.82,5313) 3405,5313 ccw(c3339.82,5313) 3385.91,5359.09 ; 3402.81,5342.19 ccw(c3425,5364.38) 3425,5333 cw(c3425,5364.38) 3402.81,5342.19 ; 3402.98,5342.02 cw(c3373.96,5313) 3415,5313 ccw(c3373.96,5313) 3402.98,5342.02 ; R17.2@3435.17,5323 ccw(c3435.61,5348.07) 3453.34,5330.34 cw(c3435.61,5348.07) R17.2@3435.17,5323 ; R17.2@3455,5313 cw(c3500.87,5313) 3468.44,5345.44 ccw(c3500.87,5313) R17.2@3455,5313 ; Q1.1@3458.31,5521.76 ccw(c3477.8,5521.76) 3464.02,5507.98 cw(c3477.8,5521.76) Q1.1@3458.31,5521.76
NetQ1_2: Q1.2 R16.1 | length 387.2
  Bottom Layer w10: Q1.2@3520.4,5522.74 3520.4,5424.6 R16.1@3521,5424 ; 3520.4,5491.06 cw(c3551.1,5491.06) 3529.39,5512.76 ccw(c3551.1,5491.06) 3520.4,5491.06 ; 3520.4,5491.06 ccw(c3489.7,5491.06) 3511.41,5512.76 cw(c3489.7,5491.06) 3520.4,5491.06 ; R16.1@3505.86,5439.14 ccw(c3470.75,5474.25) 3520.4,5474.25 cw(c3470.75,5474.25) R16.1@3505.86,5439.14 ; R16.1@3512.93,5432.07 ccw(c3494.89,5450.11) 3520.4,5450.11 cw(c3494.89,5450.11) R16.1@3512.93,5432.07 ; 3520.4,5472.31 ccw(c3567.31,5472.31) 3534.14,5439.14 cw(c3567.31,5472.31) 3520.4,5472.31
NetQ2_2: Q2.2 R17.1 | length 1053.2
  Bottom Layer w10: Q2.2@3240.6,5800.26 3459.86,5581 3517.79,5581 3570,5528.79 3570,5363 R17.1@3521,5314 ; R17.1@3525,5313 ccw(c3513.75,5351.56) 3552.55,5341.16 ; R17.1@3527.8,5303.4 ccw(c3519.57,5331.6) R17.1@3547.95,5324 ; Q2.2@3240.6,5786.56 cw(c3240.6,5753.48) 3263.99,5776.87 ccw(c3240.6,5753.48) Q2.2@3240.6,5786.56 ; Q2.2@3253.31,5799.28 ccw(c3281.64,5799.28) 3261.61,5779.25 cw(c3281.64,5799.28) Q2.2@3253.31,5799.28 ; R17.1@3525,5333 ccw(c3525,5369.21) 3550.61,5343.61 cw(c3525,5369.21) R17.1@3525,5333 ; R17.1@3535,5313 cw(c3571.21,5313) 3545.61,5338.61 ccw(c3571.21,5313) R17.1@3535,5313 ; R17.1@3545,5313 cw(c3605.36,5313) 3562.68,5355.68 ccw(c3605.36,5313) R17.1@3545,5313
NetQ2_3: Q2.3 R18.2 | length 717.1
  Bottom Layer w10: v2@2904,6151 3084,5971 3084,5870 3105,5849 3163,5849 3202,5810 3202,5788 3255,5735 3255,5731 ; 3254.61,5731.13 ccw(c3278,5754.52) Q2.3@3278,5721.44 ; 3256.99,5728.75 cw(c3236.96,5708.72) Q2.3@3265.28,5708.72 ; Q2.3@3278,5707.74 Q2.3@3278,5709 ; v2@2904,6144 cw(c2904,6127.1) 2915.95,6139.05 ccw(c2904,6127.1) v2@2904,6144 ; v2@2913,6153 ccw(c2939.56,6153) 2920.78,6134.22 cw(c2939.56,6153) v2@2913,6153
  other v2: 2904,6153
NetQ3_1: Q3.1 R32.2 | length 281.1
  Top Layer w15: R32.2@6390,7574 Q3.1@6516,7574 6518,7574 Q3.1@6519,7575 ; R32.2@6407.37,7561.63 cw(c6437.25,7531.75) 6437.25,7574 cw(c6437.25,7616.25) R32.2@6407.37,7586.37 ; Q3.1@6500.09,7558.09 ccw(c6461.68,7519.68) 6461.68,7574 ccw(c6461.68,7628.32) Q3.1@6500.09,7589.91
NetQ4_1: Q4.1 R33.2 | length 150.9
  Bottom Layer w80: v2(7942,7595) 8085.36,7595 Q4.1@8090.68,7589.68
NetQ5_1: Q5.1 R30.2 | length 514.9
  Top Layer w15: Q5.1@8475,7090 8548,7163 R30.2@8808,7163 ; Q5.1@8475,7112.5 ccw(c8475,7166.82) 8513.41,7128.41 ccw(c8551.82,7090) Q5.1@8497.5,7090 ; 8762.92,7163 cw(c8762.92,7113.92) R30.2@8797.63,7148.63 ; 8772.58,7163 ccw(c8772.58,7198.42) R30.2@8797.63,7173.37
NetQ6_1: Q6.1 R31.2 | length 495.3
  Bottom Layer w80: Q6.1@8346,5573 8346,5579.07 8414.93,5648 8477.07,5648 8478.07,5647 8513.93,5647 8514.93,5648 8663.56,5648 8667.56,5644 ; 8655.37,5648 cw(c8655.37,5578.37) v3@8704.61,5627.61 ; v3@8696,5618 8670,5644 8667.56,5644 ; v3@8705.29,5626.88 ccw(c8667.56,5593.88) 8667.56,5644
  other v3: 8694,5617
NetR16_2: R16.2 U2.13 | length 355.4
  Bottom Layer w10: U2.13@3277.36,5425 3428,5425 R16.2@3429,5424 ; 3325.3,5425 cw(c3325.3,5441.44) 3313.67,5429.82 ccw(c3325.3,5441.44) 3325.3,5425 ; 3325.3,5425 ccw(c3325.3,5408.56) 3313.67,5420.18 cw(c3325.3,5408.56) 3325.3,5425 ; 3376.72,5425 cw(c3376.72,5376.72) 3410.86,5410.86 ccw(c3376.72,5376.72) 3376.72,5425 ; 3376.72,5425 ccw(c3376.72,5473.28) 3410.86,5439.14 cw(c3376.72,5473.28) 3376.72,5425